# Allegro board 1_design.brd
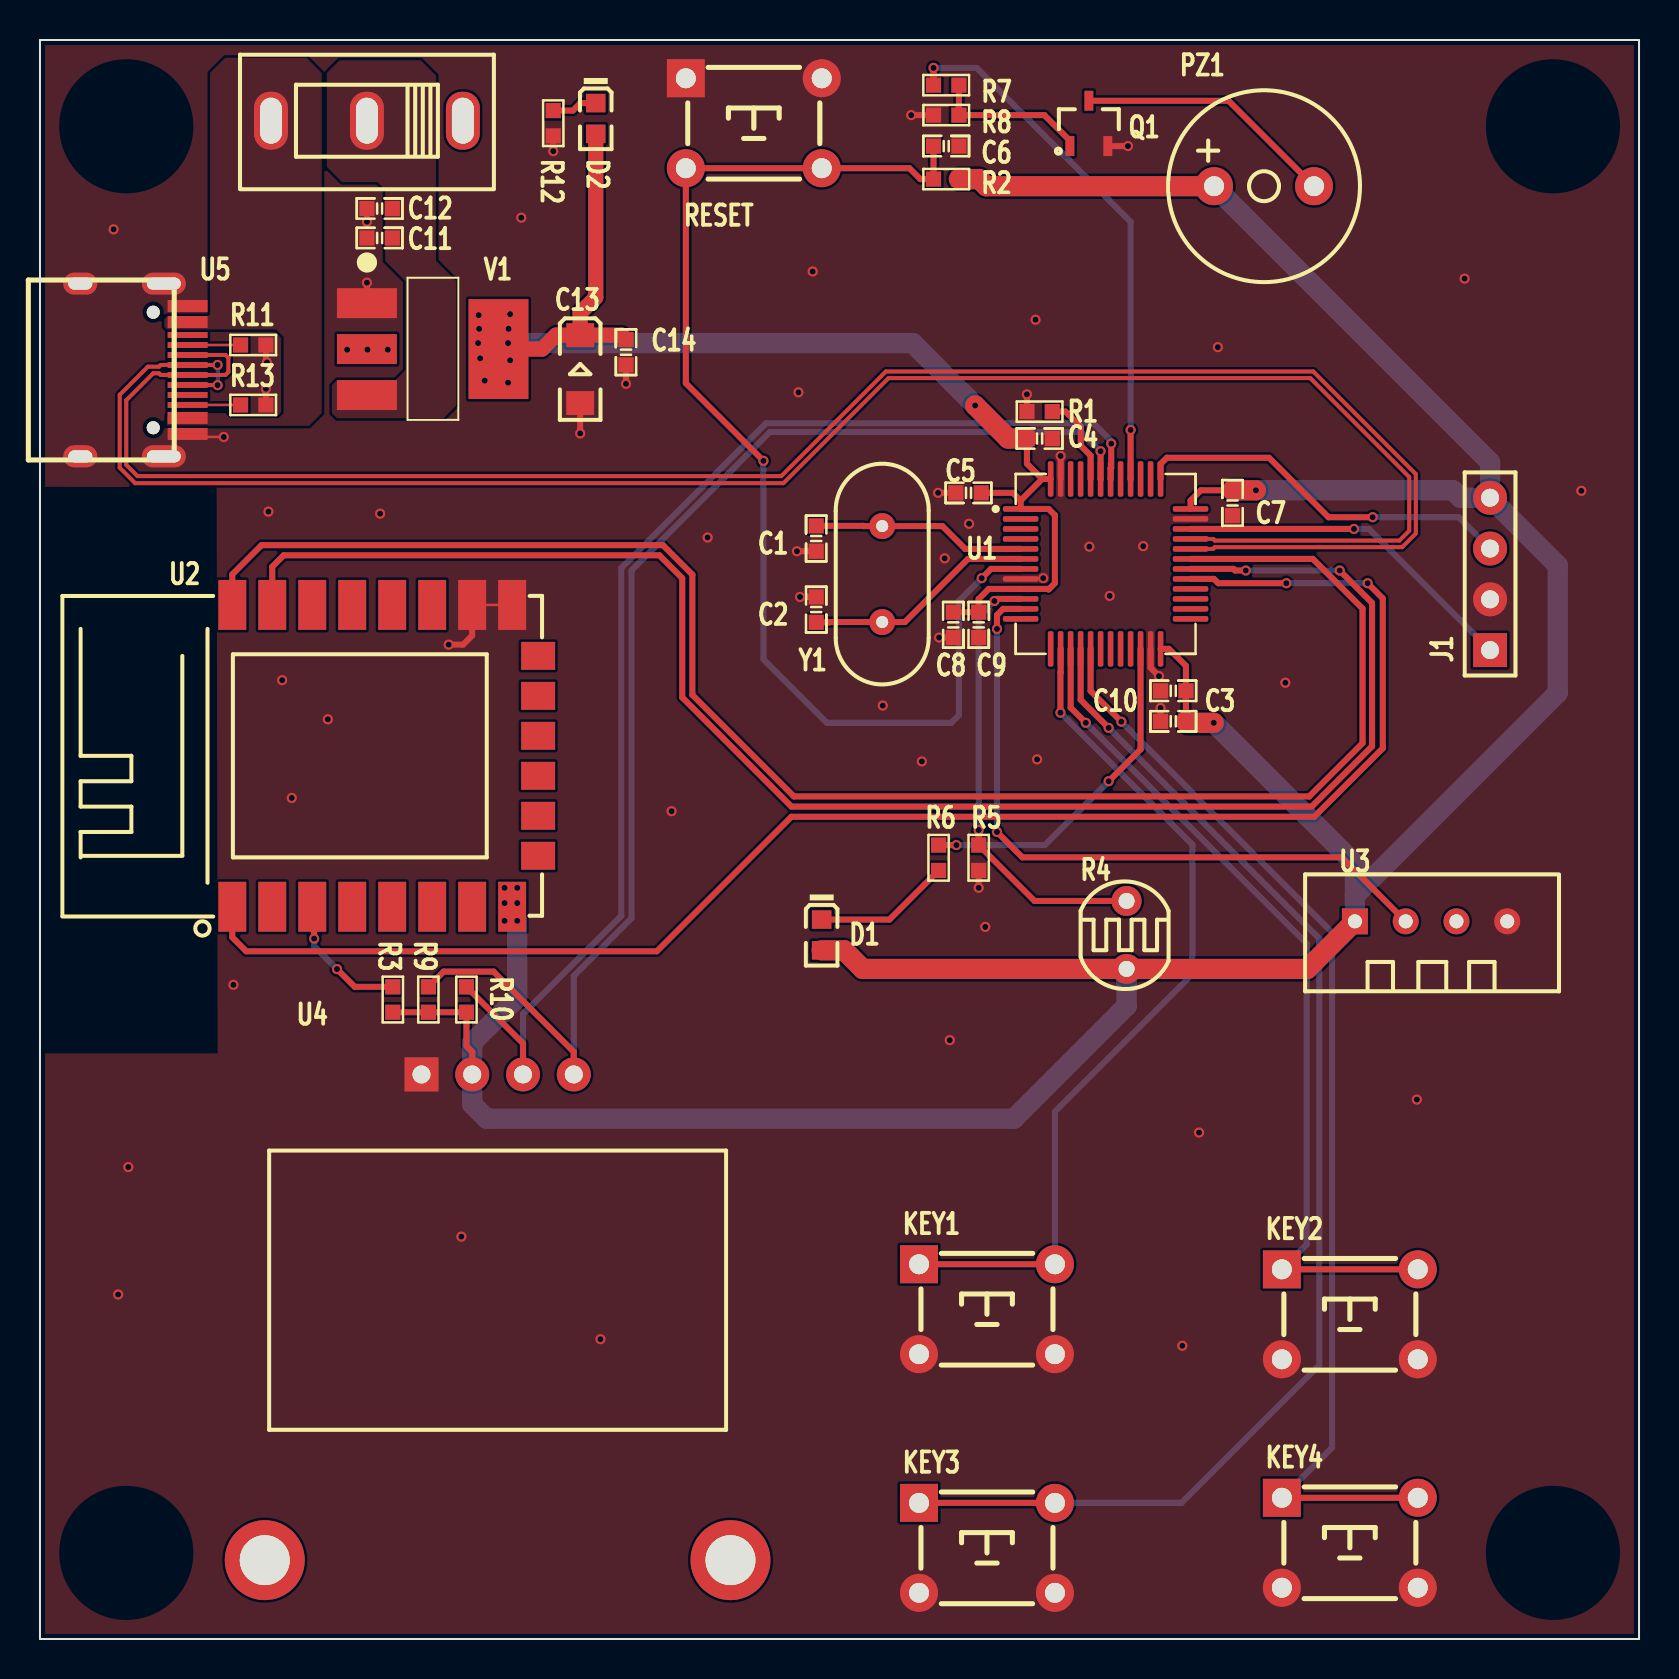
[diagram p0: board, top side]
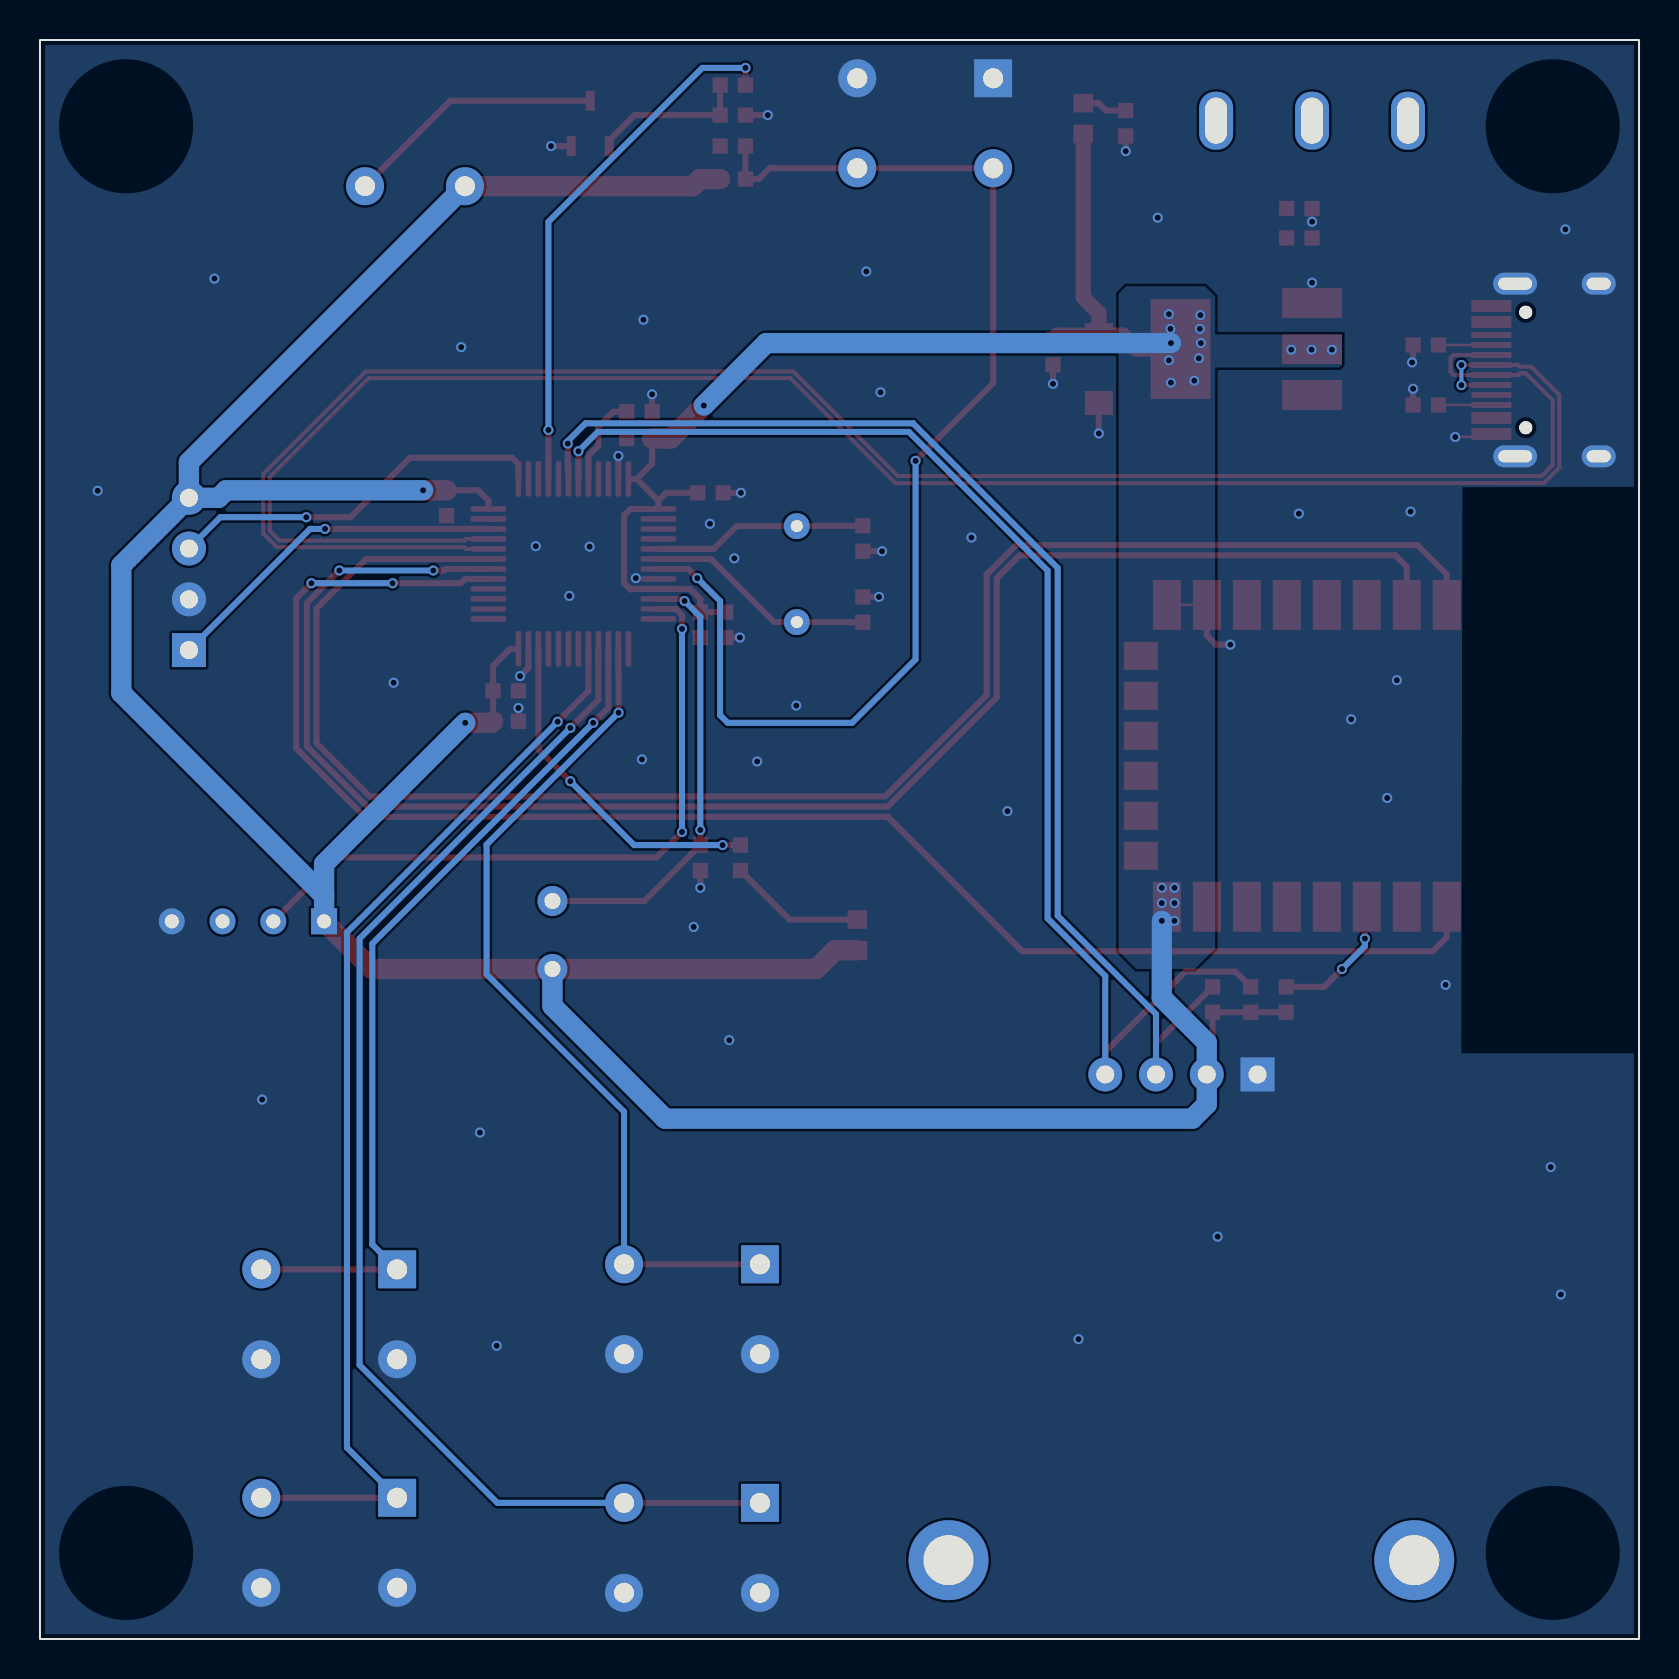
[diagram p1: board, bottom side, seen from below]

Outline 80 x 80 mm; copper layers: TOP, BOTTOM. Coordinates in mm from the lower left corner of the outline.
Outline path: rectangle 0,0 80,80

## Design rules (mm)
constraint set DEFAULT: min track width 0.127
net group USB_D: nets USB_D+ USB_D-
nets with their own width: min track width 0.127; nets BEEP DHT11 ESP12F_RST ESP12F_RXD ESP12F_TXD GND KEY1 KEY2 KEY3 KEY4 LED1 LIGHT N11861 N11918 N12503 N13315 N14563 N14741 N16128 N16229 NRST OLED_SCL OLED_SDA OSC_IN OSC_OUT SWCLK SWIO VCC_3V3 VCC_5V VCC_USB

## Placement (name value [footprint] x y rotation side)
C1  22pF,16V  [0603_C_L]  38.84 55.06 270 top
C2  22pF,16V  [0603_C_L]  38.84 51.5 90 top
C3  100nF,16V  [0603_C_L]  56.7 47.44 180 top
C4  100nF,16V  [0603_C_L]  50.01 60.06 180 top
C5  100nF,16V  [0603_C_L]  46.46 57.34 0 top
C6  100nF,16V  [0603_C_L]  45.34 74.69 180 top
C7  4.7uF,16V  [0603_C_L]  59.66 56.84 270 top
C8  100nF,16V  [0603_C_L]  45.69 50.74 90 top
C9  100nF,16V  [0603_C_L]  46.96 50.74 90 top
C10  4.7uF,16V  [0603_C_L]  56.7 45.91 0 top
C11  10uF,16V  [0603_C_L]  16.99 70.09 180 top
C12  100nF,16V  [0603_C_L]  16.99 71.57 180 top
C13  10uF,16V  [A3216]  27.03 63.53 270 top
C14  100nF,16V  [0603_C_L]  29.32 64.38 270 top
D1  LED RED  [0603_LED_L]  39.11 35.23 90 top
D2  LED RED  [0603_LED_L]  27.81 76.07 90 top
J1  HEADER 4  [HDR4P-P2_54-D0_9]  72.55 53.29 90 top
KEY1  SW PUSHBUTTON  [TSW-THR-L6-W6-P6_5-4_5-D1]  47.38 16.5 0 top
KEY2  SW PUSHBUTTON  [TSW-THR-L6-W6-P6_5-4_5-D1]  65.53 16.25 0 top
KEY3  SW PUSHBUTTON  [TSW-THR-L6-W6-P6_5-4_5-D1]  47.38 4.56 0 top
KEY4  SW PUSHBUTTON  [TSW-THR-L6-W6-P6_5-4_5-D1]  65.53 4.82 0 top
PZ1  PIEZO BUZZER_0  [BUZ-THR-D9-P5_0-D0_6]  61.24 72.68 0 top
Q1  NPN  [SOT23-3-L]  52.48 75.83 0 top
R1  10K  [0603_R_L]  50.01 61.41 180 top
R2  10K  [0603_R_L]  45.34 73.04 0 top
R3  100R  [0603_R_L]  17.65 31.99 90 top
R4  10K  [RES-THR-L5_1-W4_3-P3_40-D0_5]  54.36 35.23 0 top
R5  10K  [0603_R_L]  46.96 39.09 90 top
R6  1K  [0603_R_L]  44.96 39.09 270 top
R7  1K  [0603_R_L]  45.34 77.74 0 top
R8  10K  [0603_R_L]  45.34 76.24 0 top
R9  10K  [0603_R_L]  19.43 31.99 270 top
R10  10K  [0603_R_L]  21.34 31.99 270 top
R11  5K1  [0603_R_L]  10.67 64.74 0 top
R12  1K  [0603_R_L]  25.68 75.83 90 top
R13  5K1  [0603_R_L]  10.67 61.74 0 top
RESET  SW PUSHBUTTON  [TSW-THR-L6-W6-P6_5-4_5-D1]  35.71 75.83 0 top
SWITCH  SS12D10  [SS12D10-THR-L12_7-W6_7-P4_8-D0_8]  16.36 75.96 180 top
U1  STM32F103C8T6  [LQFN48-L7-W7-P0_5]  53.31 53.79 270 top
U2  ESP-12F  [ESP8266-12F]  17.27 44.19 0 top
U3  -  [DHT11]  69.6 35.91 0 top
U4  OLED  [OLED-0_96-4P]  22.9 28.25 0 top
U5  TYPE-C-31-M-12  [TYPE-C-SMD]  7.11 63.49 270 top
V1  AMS1117-3V3  [SOT-223]  16.36 66.84 180 top
Y1  8MHz  [OSC-THR-L11-W4_65-P5-D0_5]  42.14 53.28 90 top

## Library data of the parts
C1-C12 C14 = CAP NP
C13 = CAP POL
D1 D2 = LED RED
J1 = HEADER 4
KEY1-KEY4 RESET = SW_PB_ESW_0
PZ1 = PIEZO BUZZER_0
Q1 = NPN
R1-R3 R5-R13 = R
R4 = GL5528
SWITCH = SS12D10
U1 = STM32F103C8T6
U2 = ESP-12F
U3 = DHT11
U4 = OLED
U5 = TYPE-C-31-M-12
V1 = AMS1117-3V3
Y1 = CRYSTAL

## Footprints (pads in the part's own frame, mm; a bottom-side part is the same pattern mirrored in y, then rotated)
0603_C_L
  rect 0.762x0.762 smd: 1(-0.635,0) 2(0.635,0)
0603_LED_L
  rect 0.93x0.98 smd: 1(-0.77,0) 2(0.77,0)
0603_R_L
  rect 0.762x0.762 smd: 1(-0.635,0) 2(0.635,0)
A3216
  rect 1.2x1.4 smd: 1(-1.7,0) 2(1.7,0)
BUZ-THR-D9-P5_0-D0_6
  round 1.9 hole 1: 1(-2.5,0) 2(2.5,0)
DHT11
  rect 1.3x1.3 hole 0.7: 1(-3.81,0)
  round 1.3 hole 0.7: 2(-1.27,0) 3(1.27,0) 4(3.81,0)
ESP8266-12F
  rect 1.4x2.5 smd: 1(-7.651,-7.551) 2(-5.651,-7.551) 3(-3.651,-7.551) 4(-1.651,-7.551) 5(0.349,-7.551) 6(2.349,-7.551) 7(4.349,-7.551) 8(6.349,-7.551) 15(6.349,7.549) 16(4.349,7.549) 17(2.349,7.549) 18(0.349,7.549) 19(-1.651,7.549) 20(-3.651,7.549) 21(-5.651,7.549) 22(-7.651,7.549)
  rect 1.7x1.4 smd: 9(7.651,-5) 10(7.651,-3) 11(7.651,-1) 12(7.651,1) 13(7.651,3) 14(7.651,5)
HDR4P-P2_54-D0_9
  rect 1.7x1.7 hole 0.9: 1(-3.81,0)
  round 1.7 hole 0.9: 2(-1.27,0) 3(1.27,0) 4(3.81,0)
LQFN48-L7-W7-P0_5
  rrect 0.279x1.778 smd: 1(-2.75,-4.25) 2(-2.25,-4.25) 3(-1.75,-4.25) 4(-1.25,-4.25) 5(-0.75,-4.25) 6(-0.25,-4.25) 7(0.25,-4.25) 8(0.75,-4.25) 9(1.25,-4.25) 10(1.75,-4.25) 11(2.25,-4.25) 12(2.75,-4.25) 25(2.75,4.25) 26(2.25,4.25) 27(1.75,4.25) 28(1.25,4.25) 29(0.75,4.25) 30(0.25,4.25) 31(-0.25,4.25) 32(-0.75,4.25) 33(-1.25,4.25) 34(-1.75,4.25) 35(-2.25,4.25) 36(-2.75,4.25)
  rrect 1.778x0.279 smd: 13(4.25,-2.75) 14(4.25,-2.25) 15(4.25,-1.75) 16(4.25,-1.25) 17(4.25,-0.75) 18(4.25,-0.25) 19(4.25,0.25) 20(4.25,0.75) 21(4.25,1.25) 22(4.25,1.75) 23(4.25,2.25) 24(4.25,2.75) 37(-4.25,2.75) 38(-4.25,2.25) 39(-4.25,1.75) 40(-4.25,1.25) 41(-4.25,0.75) 42(-4.25,0.25) 43(-4.25,-0.25) 44(-4.25,-0.75) 45(-4.25,-1.25) 46(-4.25,-1.75) 47(-4.25,-2.25) 48(-4.25,-2.75)
OLED-0_96-4P
  round 4 hole 2.5: (-11.65,-24.3) (11.65,-24.3)
  rect 1.7x1.7 hole 0.9: 1(-3.81,0)
  round 1.7 hole 0.9: 2(-1.27,0) 3(1.27,0) 4(3.81,0)
OSC-THR-L11-W4_65-P5-D0_5
  round 1.3 hole 0.6: 1(-2.4,0) 2(2.4,0)
RES-THR-L5_1-W4_3-P3_40-D0_5
  round 1.5 hole 0.8: 1(0,1.7) 2(0,-1.7)
SOT23-3-L
  rect 0.45x1 smd: 1(-0.95,-1.143) 2(0.95,-1.143) 3(0,1.125)
SOT-223
  rect 3x1.5 smd: 1(0,0) 2(0,2.3) 3(0,4.6)
  rect 3x5 smd: 4(-6.58,2.3)
SS12D10-THR-L12_7-W6_7-P4_8-D0_8
  rrect 1.7x2.9 hole 1.1x2.3 unplated: (-4.8,0) (0,0) (4.8,0)
TSW-THR-L6-W6-P6_5-4_5-D1
  rect 1.9x1.9 hole 1: 1(-3.4,2.25)
  round 1.9 hole 1: 2(3.4,2.25) 3(-3.4,-2.25) 4(3.4,-2.25)
TYPE-C-SMD
  round 0.65 hole 0.65 unplated: (-2.89,-1.445) (2.89,-1.445)
  rect 0.3x2 smd: A1(-3.35,0.275) A4(-2.55,0.275) A5(-1.25,0.275) A6(-0.25,0.275) A7(0.25,0.275) A8(1.25,0.275) A9(2.55,0.275) A12(3.35,0.275) B1(3.05,0.275) B4(2.25,0.275) B5(1.75,0.275) B6(0.75,0.275) B7(-0.75,0.275) B8(-1.75,0.275) B9(-2.25,0.275) B12(-3.05,0.275)
  oval 1.1x1.7 hole 0.6x1.2: C1(-4.32,-5.095) C2(4.32,-5.095)
  oval 1.1x2.2 hole 0.6x1.7: C3(-4.32,-0.915) C4(4.32,-0.915)

## Nets
GND: C1.2 C2.2 C3.2 C4.1 C5.1 C6.1 C7.2 C8.1 C9.1 C10.1 C11.2 C12.2 C13.2 C14.2 J1.2 KEY1.3 KEY1.4(B2) KEY2.3 KEY2.4(B2) KEY3.3 KEY3.4(B2) KEY4.3 KEY4.4(B2) Q1.2(EMITTER) R1.2 R5.1 R8.1 R11.2 R12.1 R13.2 RESET.1 RESET.2 U1.8 U1.23 U1.35 U1.47(VSS_3) U2.15 U2.16 U3.4 U4.1 U5.A1 U5.A12 U5.B1 U5.B12 U5.C1 U5.C2 U5.C3 U5.C4 V1.1
VCC_3V3: C3.1 C4.2 C5.2 C7.1 C8.2 C9.2 C10.2 C13.1 C14.1 D1.1 D2.1 J1.4 PZ1.1 R2.2 R3.1 R4.2 R9.2 R10.2 U1.1 U1.9 U1.24 U1.36 U1.48 U2.8(VCC) U3.1(VDD) U4.2(VCC) V1.2 V1.4(VOUT2)
VCC_5V: C11.1 C12.1 V1.3
VCC_USB: U5.A4 U5.A9 U5.B4(VBUS4) U5.B9
BEEP: R7.1 U1.40
DHT11: U1.11 U3.2
ESP12F_RST: U1.29 U2.1
ESP12F_RXD: U1.30 U2.21
ESP12F_TXD: U1.31 U2.22
KEY1: KEY1.1 KEY1.2 U1.14
KEY2: KEY2.1 KEY2.2 U1.15
KEY3: KEY3.1 KEY3.2 U1.16
KEY4: KEY4.1 KEY4.2 U1.17
LED1: R6.1 U1.22
LIGHT: R4.1 R5.2 U1.10
NRST: C6.2 R2.1 RESET.3 RESET.4(B2) U1.7
OLED_SCL: R10.1 U1.42 U4.3
OLED_SDA: R9.1 U1.43 U4.4
OSC_IN: C1.1 U1.5 Y1.2
OSC_OUT: C2.1 U1.6 Y1.1
SWCLK: J1.3 U1.37
SWIO: J1.1 U1.34
USB_D+: U1.33 U5.A6 U5.B6
USB_D-: U1.32 U5.A7 U5.B7
N11861: R11.1 U5.A5
N11918: R13.1 U5.B5
N12503: D2.2 R12.2
N13315: R3.2 U2.3
N14563: R1.1 U1.44
N14741: D1.2 R6.2
N16128: PZ1.2(-) Q1.3
N16229: Q1.1 R7.2 R8.2

Pads without a net: U1 2 3 4 12 13 18 19 20 21 25 26 27 28 38 39 41 45 46; U2 2 4 5 6 7 9 10 11 12 13 14 17 18 19 20; U3 3; U5 A8 B8

## Via types
v1: diameter 0.508, hole 0.305, TOP to BOTTOM, 103 vias

## Routing (per net, layer and track width the routed paths; a pad name or vN(x,y) marks a point on that pad's centre or on a via; arc(x,y) is an arc through that point)
GND: length 23.9
  TOP w0.127: U5.A12 9.19,60.14 v1(9.19,60.14) ; U2.15 U2.16
  TOP w0.305: U1.47 v1(51.06,59.19) ; v1(20.45,49.75) 21.16,49.75 21.62,50.21 U2.16 ; C5.1 v1(44.93,57.34) ; R13.2 v1(11.3,62.55) ; R8.1 v1(43.59,76.24) ; V1.1 v1(16.36,67.86) ; v1(55.98,48.17) 55.56,48.59 U1.23 ; C2.2 v1(38.02,52.14) ; Q1.2 v1(54.43,74.69) ; R11.2 11.3,63.92 v1(11.35,63.87) ; C14.2 v1(29.32,62.8) ; C12.2 v1(16.36,70.91) ; R12.1 v1(25.68,74.44) ; C13.2 v1(27.03,60.31) ; R5.1 v1(46.96,37.58) ; R1.2 v1(49.38,62.27) ; C10.1 v1(56.06,46.58) ; C1.2 v1(37.87,54.42) ; C8.1 v1(44.98,50.1)
  vias: v1(3.68,70.53) v1(3.91,17.24) v1(4.42,23.61) v1(9.68,32.73) v1(11.43,56.4) v1(12.12,47.97) v1(12.6,42.08) v1(14.4,46.01) v1(17.02,56.3) v1(21.08,20.13) v1(24.08,71.11) v1(28.04,15) v1(31.6,41.42) v1(33.4,55.11) v1(37.95,62.37) v1(38.66,68.42) v1(42.16,46.7) v1(44.12,43.91) v1(45.26,54.07) v1(45.52,29.96) v1(46.48,55.79) v1(47.29,35.63) v1(49.81,66) v1(49.89,44.01) v1(50.19,53.08) v1(52.5,54.65) v1(53.52,52.19) v1(55.19,54.68) v1(57.15,14.67) v1(57.99,25.34) v1(58.93,64.63) v1(62.31,47.84) v1(68.88,26.99) v1(71.27,68.06) v1(77.11,57.44)
VCC_3V3: length 239.7
  TOP w0.305: 49.06,56.96 U1.1 50.46,56.54 50.77,56.23 50.77,52.82 50.47,52.52 50.44,52.52 50.42,52.54 U1.9 47.47,52.54 46.96,52.03 C9.2 C8.2 ; 49.06,56.96 50.14,58.04 ; 49.06,56.96 48.68,57.34 C5.2 ; R3.1 R9.2 R10.2 21.34,29.66 21.63,29.38 U4.2 ; 50.14,58.04 49.38,58.81 C4.2 ; 50.14,58.04 U1.48 ; C10.2 C3.1 57.33,48.69 56.48,49.54 U1.24 ; U1.36 57.56,56.96 58.08,57.47 C7.1
  TOP w0.762: C14.1 29.1,65.23 C13.1 ; D2.1 27.81,67.12 27.03,66.34 C13.1 ; V1.4 25.12,64.54 25.82,65.23 C13.1
  TOP w1.016: v1(46.79,61.71) 48.44,60.06 C4.2 ; D1.1 40.23,34.46 41.16,33.53 R4.2 63.41,33.53 U3.1 ; R2.2 46.99,73.04 47.35,72.68 PZ1.1 ; C10.2 57.41,45.84 v1(58.72,45.84) ; v1(60.83,57.47) C7.1
  BOTTOM w1.016: v1(46.79,61.71) 43.66,64.84 v1(23.42,64.84) ; v1(23.88,35.93) 23.88,32.09 21.63,29.84 U4.2 21.63,26.75 22.34,26.03 48.72,26.03 54.36,31.67 R4.2 ; U3.1 65.79,37.19 ; 65.79,37.19 75.93,47.34 75.93,53.71 J1.4 ; 65.79,37.19 65.79,38.78 v1(58.72,45.84) ; J1.4 71.06,57.1 70.69,57.47 v1(60.83,57.47) ; J1.4 72.55,58.88 PZ1.1
  vias: v1(15.37,64.51) v1(16.38,64.51) v1(17.4,64.51) v1(21.92,64.84) v1(21.95,66.23) v1(21.97,65.55) v1(22.02,64.07) v1(22.25,62.96) v1(23.24,37.58) v1(23.24,36.82) v1(23.24,35.93) v1(23.42,62.85) v1(23.52,66.28) v1(23.44,65.55) v1(23.52,63.97) v1(23.88,37.58) v1(23.88,36.82)
BEEP: length 26.8
  TOP w0.305: U1.40 v1(54.56,60.49) ; v1(44.7,78.6) R7.1
  BOTTOM w0.305: v1(54.56,60.49) 54.56,70.9 46.86,78.6 v1(44.7,78.6)
DHT11: length 34.5
  TOP w0.305: v1(47.88,40.38) 49.15,39.11 65.13,39.11 U3.2 ; v1(47.88,50.54) 47.88,51.23 48.18,51.54 U1.11
  BOTTOM w0.305: v1(47.88,40.38) v1(47.88,50.54)
ESP12F_RST: length 81.1
  TOP w0.305: v1(62.36,52.82) 58.95,52.82 58.73,53.04 U1.29 ; v1(66.42,52.82) 67.18,52.06 67.18,44.57 63.75,41.14 37.59,41.14 30.86,34.41 10.32,34.41 9.62,35.11 U2.1
  BOTTOM w0.305: v1(66.42,52.82) v1(62.36,52.82)
ESP12F_RXD: length 84.1
  TOP w0.305: v1(65.02,53.46) 66.64,51.84 66.64,44.66 63.63,41.65 37.59,41.65 32.13,47.11 32.13,53.08 30.99,54.22 12.19,54.22 11.62,53.65 U2.21 ; v1(60.32,53.46) 59.79,53.46 59.71,53.54 U1.30
  BOTTOM w0.305: v1(65.02,53.46) v1(60.32,53.46)
ESP12F_TXD: length 84.9
  TOP w0.305: U1.31 63.68,54.04 66.17,51.55 66.17,44.82 63.5,42.15 37.72,42.15 32.64,47.23 32.64,53.25 31.16,54.73 11.08,54.73 9.62,53.26 U2.22
KEY1: length 43.2
  TOP w0.305: v1(51.05,46.34) 51.05,48.36 51.06,48.37 U1.14 ; KEY1.1 KEY1.2
  BOTTOM w0.305: v1(51.05,46.34) 57.66,39.74 57.66,33.26 50.78,26.38 KEY1.2
KEY2: length 43.2
  TOP w0.305: v1(52.32,45.84) 51.56,46.6 U1.15 ; KEY2.1 KEY2.2
  BOTTOM w0.305: v1(52.32,45.84) 63.37,34.79 63.37,19.74 KEY2.1
KEY3: length 63.7
  TOP w0.305: v1(53.47,45.58) 52.06,46.99 U1.16 ; KEY3.1 KEY3.2
  BOTTOM w0.305: KEY3.2 57.11,6.81 64.01,13.71 64.01,35.04 v1(53.47,45.58)
KEY4: length 55.3
  TOP w0.305: U1.17 52.56,47.43 v1(54.1,45.89) ; KEY4.1 KEY4.2
  BOTTOM w0.305: KEY4.1 64.64,9.58 64.64,35.35 v1(54.1,45.89)
LED1: length 17.1
  TOP w0.305: R6.1 v1(45.85,39.72) ; U1.22 55.06,44.51 v1(53.47,42.92)
  BOTTOM w0.305: v1(45.85,39.72) 50.27,39.72 v1(53.47,42.92)
LIGHT: length 22.5
  TOP w0.305: v1(47.75,51.93) 47.86,52.04 U1.10 ; v1(46.96,40.48) R5.2 49.76,36.93 R4.1
  BOTTOM w0.305: v1(47.75,51.93) 46.96,51.14 v1(46.96,40.48)
NRST: length 61.2
  TOP w0.305: C6.2 R2.1 44.04,73.04 43.5,73.58 RESET.4 RESET.3 32.31,62.83 v1(36.2,58.94) ; U1.7 47.58,53.54 v1(47.12,53.08)
  BOTTOM w0.305: v1(36.2,58.94) 36.2,49.01 39.37,45.84 45.59,45.84 45.97,46.22 45.97,51.93 v1(47.12,53.08)
OLED_SCL: length 62.7
  TOP w0.305: U4.3 24.17,29.8 R10.1 ; v1(53.59,59.81) 53.59,58.6 53.56,58.56 U1.42
  BOTTOM w0.305: v1(53.59,59.81) 53.59,59.93 52.71,60.82 36.32,60.82 29.08,53.58 29.08,36.18 24.17,31.27 U4.3
OLED_SDA: length 64.9
  TOP w0.305: U1.43 53.06,58.04 v1(53.06,59.43) ; U4.4 26.71,29.38 22.69,33.39 20.19,33.39 R9.1
  BOTTOM w0.305: v1(53.06,59.43) 52.1,60.39 36.53,60.39 29.59,53.46 29.59,36.06 26.71,33.17 U4.4
OSC_IN: length 10.7
  TOP w0.305: C1.1 41.19,55.69 41.21,55.68 Y1.2 45.15,55.68 46.29,54.54 U1.5
OSC_OUT: length 11.5
  TOP w0.305: U1.6 46.43,54.04 43.27,50.88 Y1.1 39.51,50.88 39.5,50.87 C2.1
SWCLK: length 19.2
  TOP w0.305: v1(66.68,56.12) 64.47,56.12 61.49,59.1 56.37,59.1 56.06,58.79 U1.37
  BOTTOM w0.305: v1(66.68,56.12) 70.98,56.12 J1.3
SWIO: length 17.5
  TOP w0.305: U1.34 v1(65.74,55.54)
  BOTTOM w0.305: v1(65.74,55.54) 66.49,55.54 J1.1
USB_D+: length 94.6
  TOP w0.203: v1(8.89,63.74) U5.A6 6.04,63.74 5.96,63.66 5.4,63.66 3.99,62.25 3.99,58.6 4.77,57.83 37.2,57.83 42.45,63.08 63.55,63.08 68.5,58.13 68.5,55.45 68.01,54.96 58.78,54.96 58.69,55.04 U1.33 ; v1(8.89,62.73) 7.39,62.73 U5.B6
  BOTTOM w0.203: v1(8.89,63.74) v1(8.89,62.73)
USB_D-: length 95.4
  TOP w0.203: 57.53,54.54 U1.32 58.69,54.54 58.78,54.63 68.15,54.63 68.83,55.31 68.83,58.28 63.7,63.41 42.32,63.41 37.08,58.18 4.88,58.18 4.32,58.74 4.32,61.97 5.67,63.32 5.96,63.32 6.04,63.24 U5.A7 9.28,63.24 9.43,63.39 9.43,64.1 9.28,64.24 U5.B7
N11861: length 2.6
  TOP w0.127: U5.A5 R11.1
N11918: length 2.6
  TOP w0.127: U5.B5 R13.1
N12503: length 2.3
  TOP w0.305: D2.2 27.04,76.84 26.66,76.47 R12.2
N13315: length 6.8
  TOP w0.305: U2.3 13.72,36.54 v1(13.72,35.04) ; R3.2 15.75,32.63 v1(14.86,33.52)
  BOTTOM w0.305: v1(13.72,35.04) 13.72,34.66 v1(14.86,33.52)
N14563: length 4.6
  TOP w0.305: U1.44 52.56,59.21 52.07,59.7 52.07,60.64 51.31,61.41 R1.1
N14741: length 6.9
  TOP w0.305: R6.2 42.5,36 D1.2
N16128: length 13
  TOP w0.305: Q1.3 59.46,76.96 PZ1.2
N16229: length 7.9
  TOP w0.305: R7.2 R8.2 50.25,76.24 51.52,74.97 Q1.1

## Copper pours and planes (outline as drawn; the poured copper is in the pictures)
GND on TOP, BOTTOM: 0.25,79.75 79.75,79.75 79.75,0.25 0.25,0.25
VCC_3V3 on BOTTOM: 14.86,65.27 22.61,65.27 22.86,65.01 22.86,63.74 22.73,63.62 14.99,63.62 14.86,63.74
VCC_3V3 on BOTTOM: 21.72,67.68 21.21,67.17 21.21,34.53 22.23,33.52 25.15,33.52 26.04,34.41 26.04,67.3 25.65,67.68
VCC_5V on TOP: 14.99,78.98 14.35,78.35 14.35,73.65 15.11,72.89 16.89,72.89 17.27,72.51 17.27,68.95 18.29,67.93 18.29,63.49 17.78,62.98 14.86,62.98 14.6,62.73 14.6,61.33 14.86,61.08 20.19,61.08 20.83,61.71 20.83,67.93 19.81,68.95 19.81,78.22 19.05,78.98
VCC_USB on TOP: 6.35,61.2 6.35,60.7 13.46,60.7 14.1,61.33 14.1,78.35 13.34,79.11 9.27,79.11 8.51,78.35 8.51,66.28 8.38,66.16 6.35,66.16 6.22,66.03 6.22,65.65 6.35,65.52 11.81,65.52 12.19,65.14 12.19,61.33 11.94,61.08 9.52,61.08 9.27,61.33 6.48,61.33

## Text on the board
NCLEGEND-1-2: FIGURE | FINISHED_SIZE | 12.0 | 23.622 | 27.559 | 31.496 | 35.433 | 39.37 | 98.425 | 25.591 | 47.24x23.618 | 66.929x23.618 | 90.551x43.307 | DRILL CHART: TOP to BOTTOM | ALL UNITS ARE IN MILS | ROTATION | - | 0.000 | 90.000 | PLATED | NON-PLATED | QTY | 103 | 2 | 4 | 6 | 22 | 3
